# Altium PCB 故指测试架主板.PcbDoc
Units mil, origin at the board's own origin, x right, y up, seen from the top; angles counter-clockwise.
Board outline 3937.01 x 3937.01 mil, 2 copper layers (Top Layer, Bottom Layer); 125 components, 100 nets, 475 pads, 103 vias.
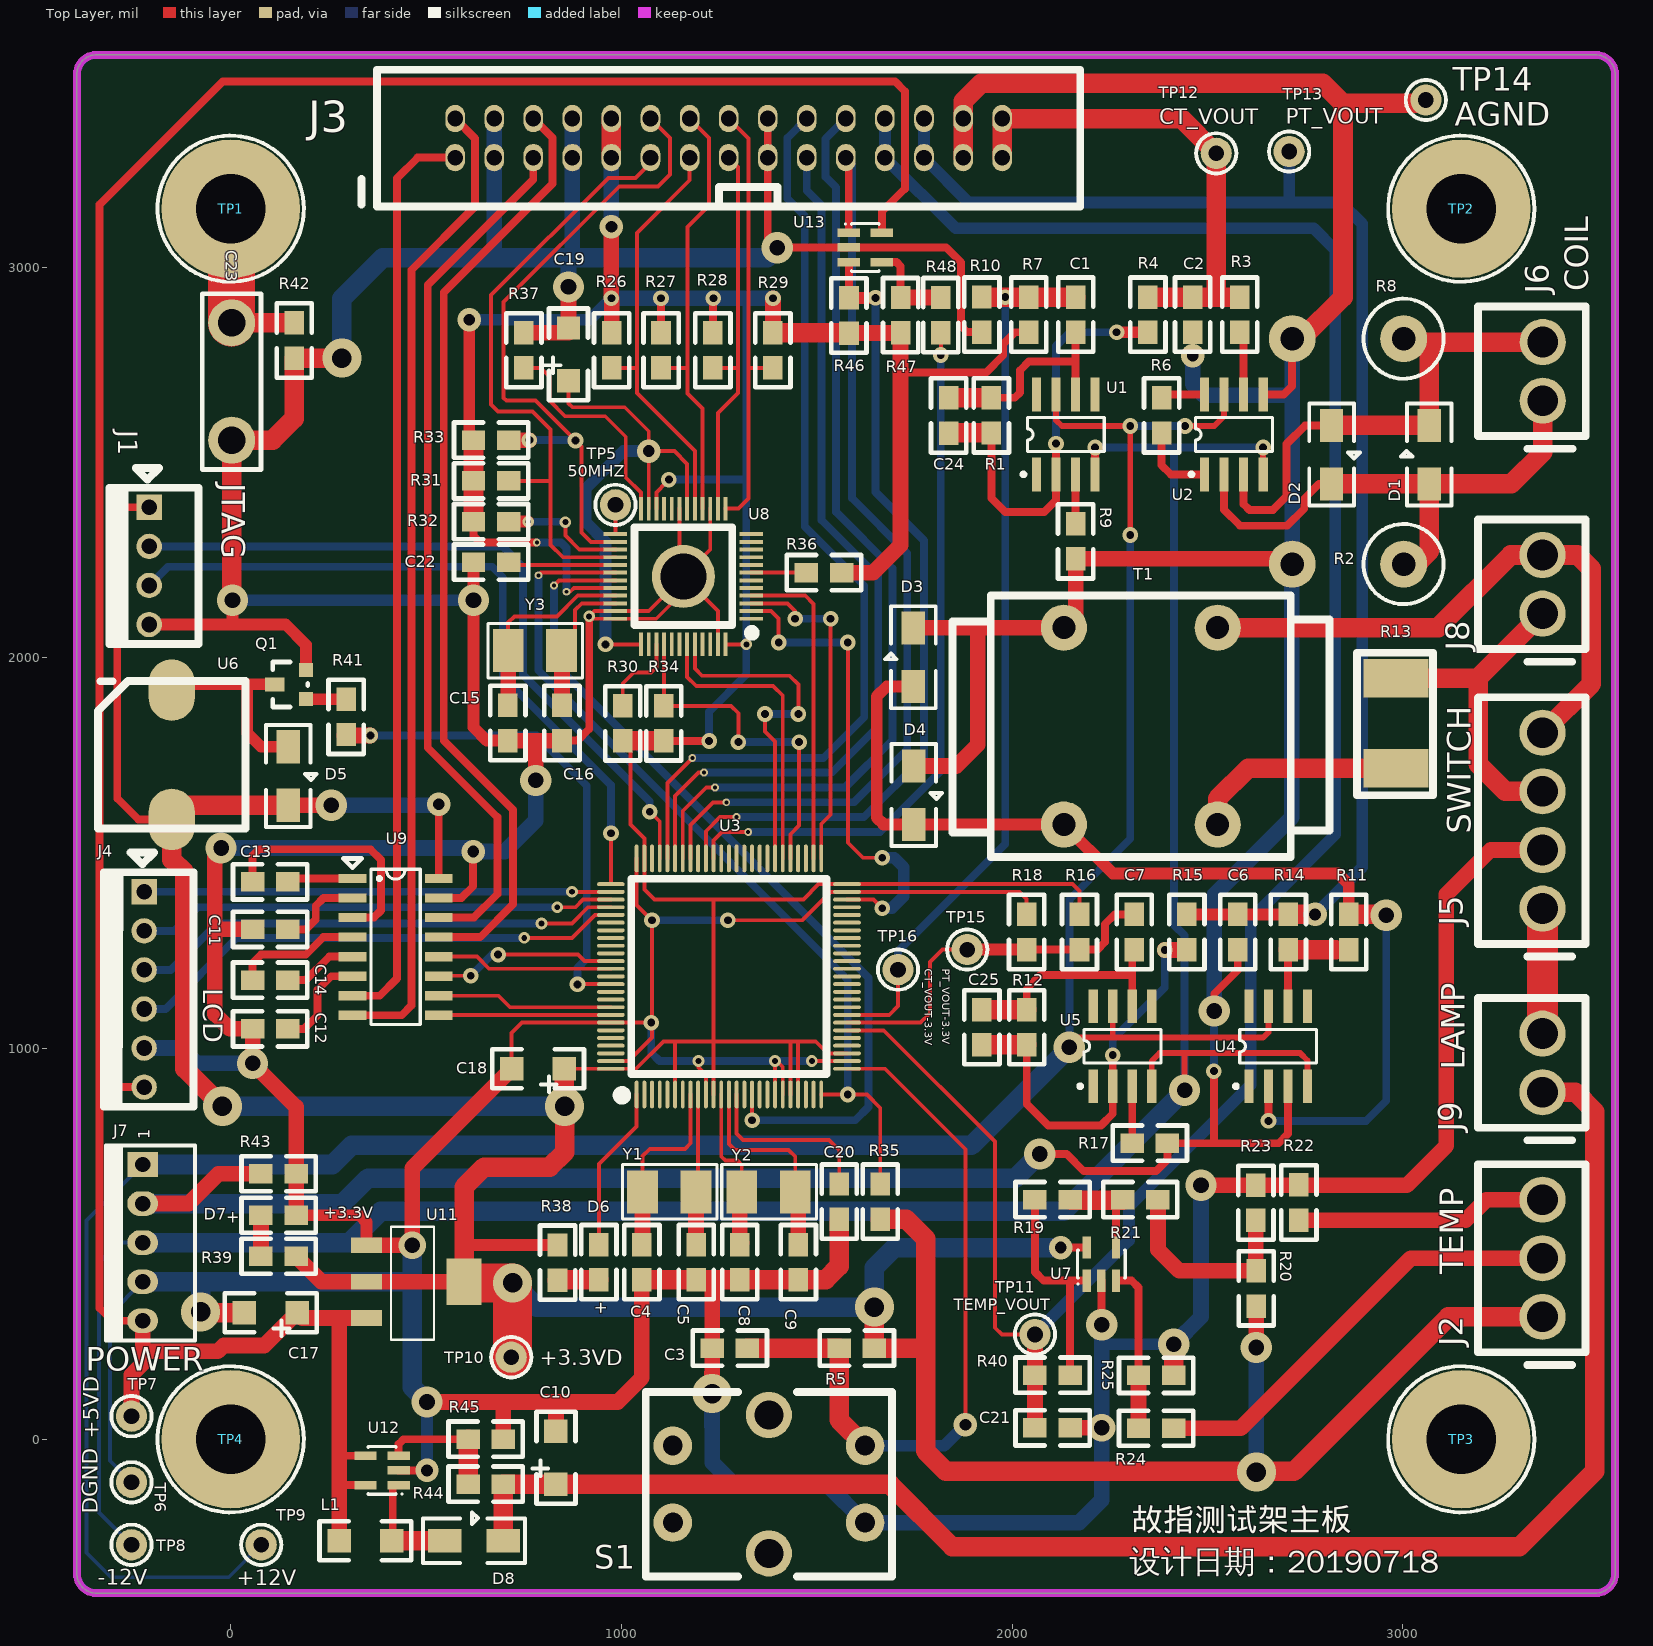
[diagram p0: Top Layer view]
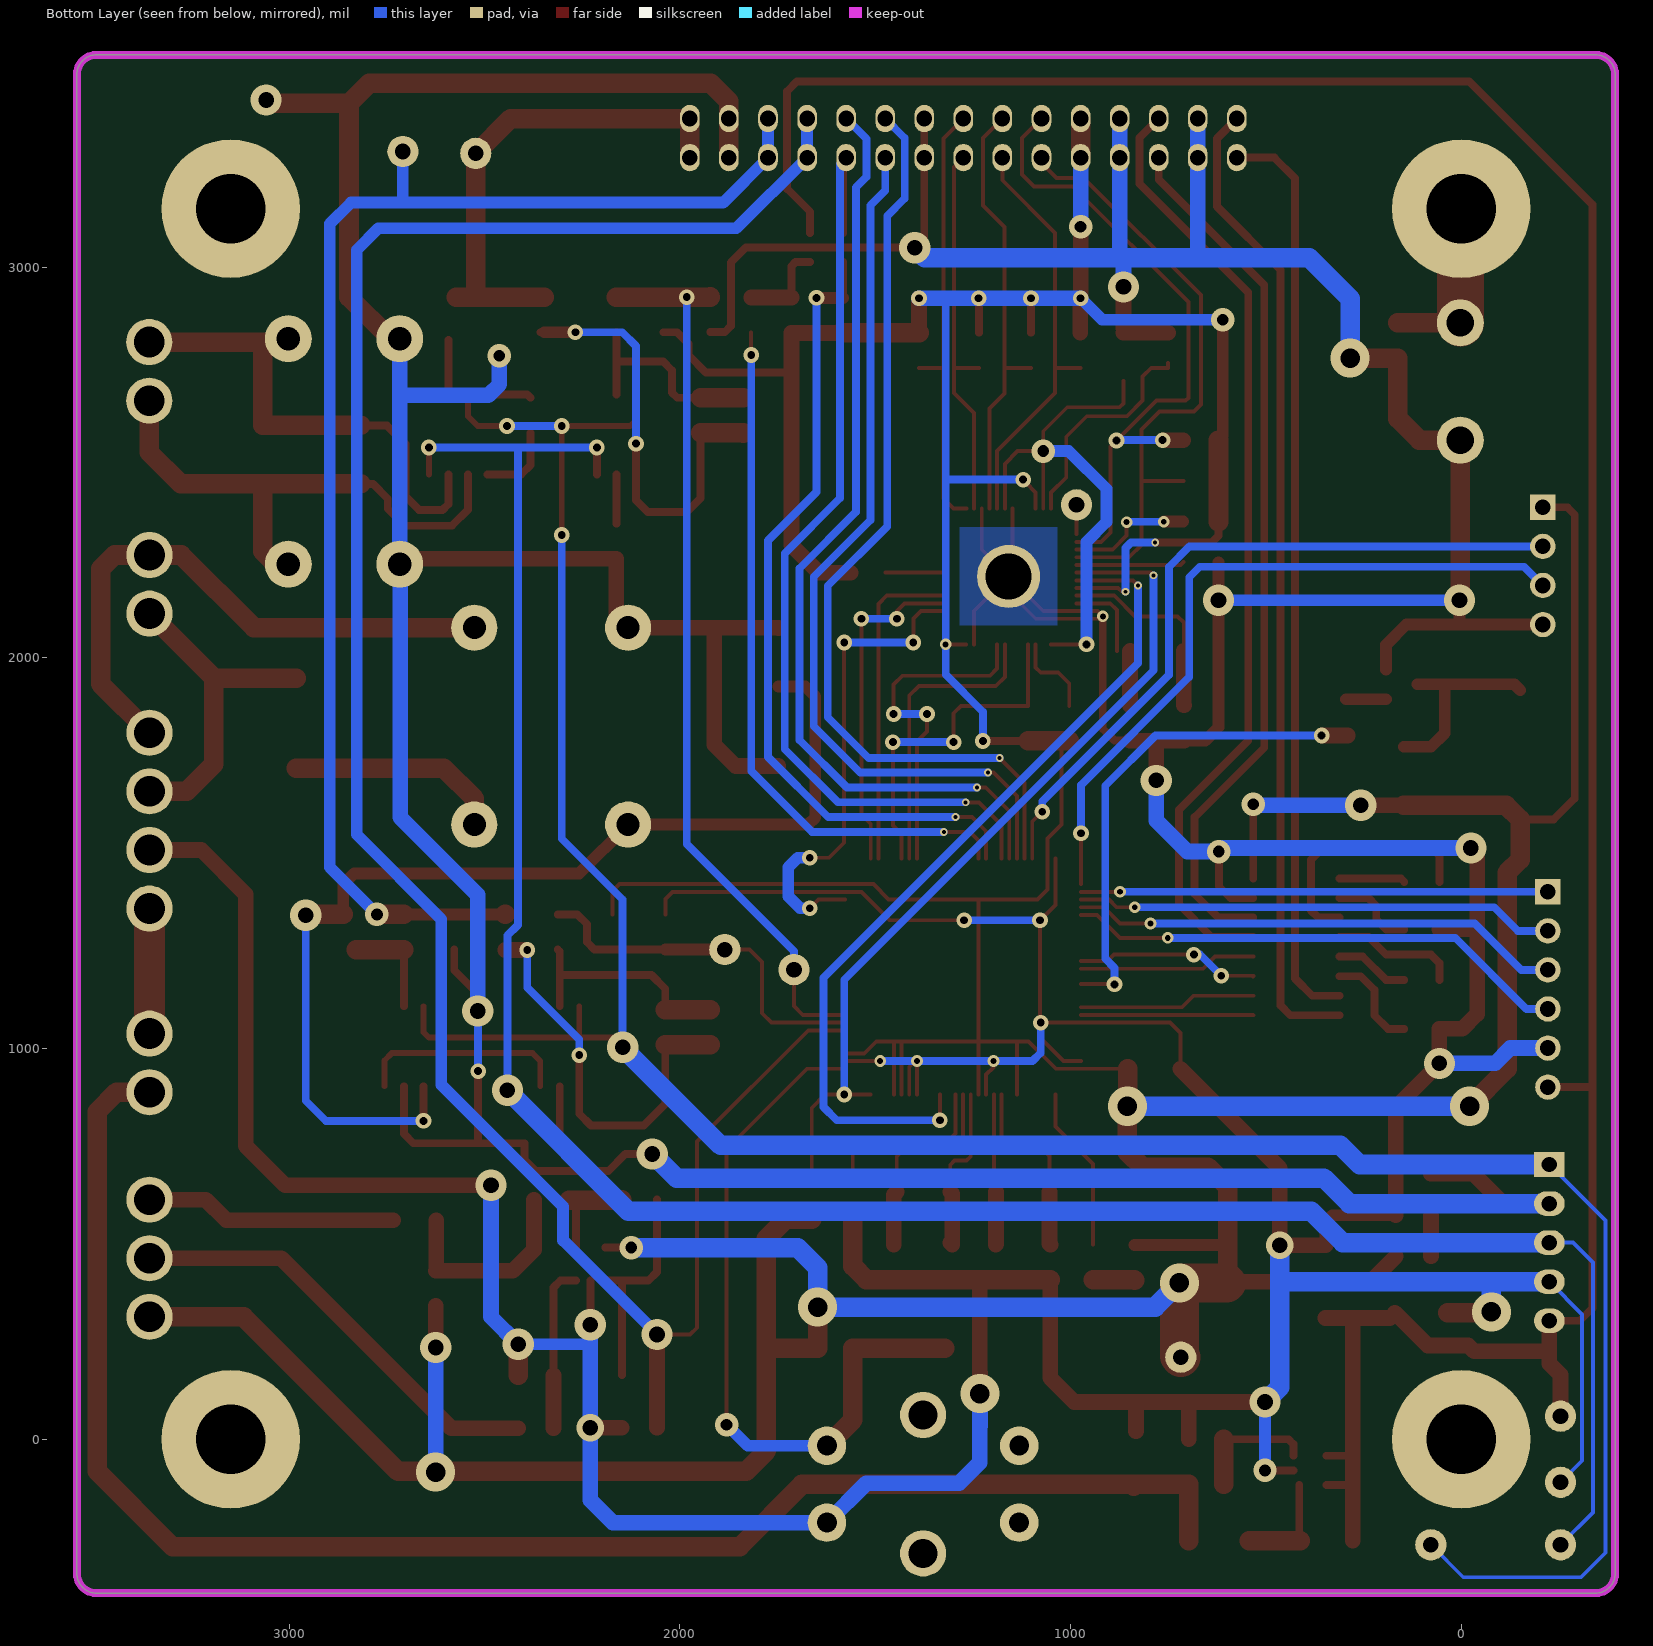
[diagram p1: Bottom Layer view, seen from below]

## Layer stack, top to bottom
Top Solder: solder mask 0.4, Solder Resist, Dk 3.5
Top Layer: signal copper 1.4
Dielectric 1: dielectric 12.6, FR-4, Dk 4.8
Bottom Layer: signal copper 1.4
Bottom Solder: solder mask 0.4, Solder Resist, Dk 3.5

## Board outline
-393.7,-343.7 ccw(c-343.7,-343.7) -343.7,-393.7 3493.31,-393.7 ccw(c3493.31,-343.7) 3543.31,-343.7 3543.31,3493.31 ccw(c3493.31,3493.31) 3493.31,3543.31 -343.7,3543.31 ccw(c-343.7,3493.31) -393.7,3493.31

## Design rules (kind name [scope] priority, off if disabled: settings)
Clearance [All] p1: gap=8 ignorepadtopadclearanceinfootprint=FALSE
ComponentClearance [All] p1 off: gap=10 collisioncheckmode=3 verticalgap=10 showdistances=FALSE
HoleSize [All] p1: absolutevalues=TRUE maxlimit=200 minlimit=1 maxpercent=80.000 minpercent=20.000
MinimumSolderMaskSliver [All] p1: minsoldermaskwidth=3
PolygonConnect [All] p1: connectstyle=Direct reliefconductorwidth=10 reliefentries=4 polygonreliefangle="90 Angle" airgapwidth=10
RoutingVias [All] p1: holewidth=20 width=40 viastyle="Through Hole" minholewidth=10 minwidth=20 maxholewidth=50 maxwidth=100
SilkToSilkClearance [All] p1 off: silktosilkclearance=10
SilkToSolderMaskClearance [IsPad] p1 off: minsilkscreentomaskgap=10 clearancetoexposedcopper=TRUE
SolderMaskExpansion [All] p1: expansion=4
Width [All] p1: maxlimit=200 minlimit=10 preferedwidth=10
25 further rules are at their usual default settings.

## Components (designator, comment, footprint, x,y, rotation, side; value= is the part's Value field where it differs from the comment)
C1 "0.1u" 0805 2162.45,2923.34 r270 top
C2 "0.1u" 0805 2462.45,2833.34 r90 top
C3 "0.1u" 0805 1322.45,233.78 r180 top
C4 "20p" 0805 1052.01,498.34 r270 top
C5 "20p" 0805 1191.01,498.34 r270 top
C6 "0.1u" 0805 2577.89,1253.34 r90 top
C7 "0.1u" 0805 2312.01,1343.34 r270 top
C8 "20p" 0805 1302.45,498.34 r270 top
C9 "20p" 0805 1452.45,498.34 r270 top
C10 "10u/16V" 1206C 832.45,-114.66 r90 top
C11 "0.1uF" 0805 146.08,1305.4 r180 top
C12 "0.1uF" 0805 146.08,1050.84 r180 top
C13 "0.1uF" 0805 146.08,1427.12 r180 top
C14 "0.1uF" 0805 56.08,1174.96 r0 top
C15 "20p" 0805 709.01,1878.34 r270 top
C16 "20p" 0805 847.45,1878.34 r270 top
C17 "10u/16V" 1206C 170,324 r180 top
C18 "10u/16V" 1206C 854.18,948.34 r180 top
C19 "10u/16V" 1206C 864.59,2709.34 r90 top
C20 "0.1u" 0805 1557.89,563.34 r90 top
C21 "0.1u" 0805 2148.45,29.78 r180 top
C22 "0.1u" 0805 621.45,2244.49 r0 top
C23 "472/250V" RAD0.3 2.24,2858.24 r270 top
C24 "0.1u" 0805 1837.01,2665.34 r270 top
C25 "0.1u" 0805 1922.01,1099.65 r270 top
D1 "SS14" SMA 3067.45,2445.25 r90 top
D2 "SS14" SMA 2817.45,2594.86 r270 top
D3 "SS14" SMA 1747.45,1926.73 r90 top
D4 "SS14" SMA 1748.45,1723.34 r270 top
D5 "SS14" SMA 147.45,1772.34 r270 top
D6 "DEBUG" LED-0805 942.45,408.34 r90 top
D7 "+3.3V" LED-0805 77.45,573.34 r0 top
D8 "SS14" SMA 547.84,-259.66 r0 top
J1 "JTAG" 2510-4Y -208.68,2385.34 r270 top
J2 "TEMP" KF2EDG3.81-3P 3357.45,313.34 r90 top
J3 "CON30" IDC-30 574.45,3280.34 r180 top
J4 "LCD" 2510-6Y -221.55,1401.34 r270 top
J5 "SWITCH" KF2EDG3.81-4P 3357.45,1358.34 r90 top
J6 "COIL" KF2EDG3.81-2P 3358.07,2658.34 r90 top
J7 "POWER" 2510-5Y -225.43,703.34 r90 top
J8 "TRANSFOMER" KF2EDG3.81-2P 3357.45,2113.34 r90 top
J9 "LAMP" KF2EDG3.81-2P 3357.45,888.34 r90 top
L1 "10uH/1A" 1206 277.45,-259.66 r0 top
Q1 "S9013" SOT-23 192.45,1894.34 r90 top
R1 "2k" 0805 1947.45,2575.61 r90 top
R2 "0.05" LVR03 3002,2240 r180 top
R3 "51" 0805 2582.01,2923.34 r270 top
R4 "10k" 0805 2347.01,2923.34 r270 top
R5 "10k" 0805 1647.45,233.78 r180 top
R6 "5.1k" 0805 2382.01,2665.61 r270 top
R7 "510" 0805 2042.89,2833.34 r90 top
R8 "0.05" LVR03 3002,2817 r180 top
R9 "10k" 0805 2162.89,2253.34 r90 top
R10 "510" 0805 1922.01,2923.66 r270 top
R11 "5.1k" 0805 2861.01,1343.34 r270 top
R12 "2k" 0805 2037.89,1009.65 r90 top
R13 "100k" 2512 2982.45,1948.34 r270 top
R14 "51" 0805 2707.45,1253.34 r90 top
R15 "10k" 0805 2447.01,1343.34 r270 top
R16 "510" 0805 2172.01,1343.34 r270 top
R17 "10k" 0805 2397.45,758.34 r180 top
R18 "510" 0805 2037.45,1253.34 r90 top
R19 "100k" 0805 2148.45,613.78 r180 top
R20 "100" 0805 2624.56,431 r270 top
R21 "1k" 0805 2283,612.9 r0 top
R22 "100" 0805 2733.56,651 r270 top
R23 "100" 0805 2623.45,650.34 r270 top
R24 "1k" 0805 2323.45,27.9 r0 top
R25 "100k" 0805 2323.45,162.9 r0 top
R26 "51" 0805 975.47,2742.34 r90 top
R27 "51" 0805 1101.78,2742.34 r90 top
R28 "51" 0805 1234.78,2742.34 r90 top
R29 "51" 0805 1388.34,2742.34 r90 top
R30 "10k" 0805 1003.89,1787.34 r90 top
R31 "10k" 0805 711.45,2453.34 r180 top
R32 "10k" 0805 711.45,2349.34 r180 top
R33 "10k" 0805 711.45,2557.78 r180 top
R34 "10k" 0805 1108.89,1787.34 r90 top
R35 "10k" 0805 1662.01,653.34 r270 top
R36 "10k" 0805 1563.45,2218.78 r180 top
R37 "4.87k" 0805 749.9,2832.34 r270 top
R38 "1k" 0805 836.89,407.34 r90 top
R39 "1k" 0805 77.45,467.9 r0 top
R40 "510" 0805 2058.45,163.9 r0 top
R41 "510" 0805 295.01,1893.9 r270 top
R42 "1M" 0805 162.01,2857.34 r270 top
R43 "0" 0805 77.45,679.34 r0 top
R44 "10k" 0805 697.45,-114.22 r180 top
R45 "1.2k" 0805 607.45,-0.1 r0 top
R46 "10k" 0805 1582.01,2921.34 r270 top
R47 "10k" 0805 1714.89,2832.34 r90 top
R48 "0" 0805 1817.89,2832.34 r90 top
S1 "" B3F-4055 1623.48,-213.32 r0 top
T1 "TR3121CH 2mA/2mA" TR3121CH 2132.45,1573.34 r90 top
TP1 "" PAD4.5 0,3149.61 r0 top locked
TP2 "" PAD4.5 3149.61,3149.61 r0 top locked
TP3 "" PAD4.5 3149.61,0 r0 top locked
TP4 "" PAD4.5 0,0 r0 top locked
TP5 "50MHZ" TESTPOINT 984.73,2391.73 r0 top
TP6 "DGND" TESTPOINT -254,-110 r0 top
TP7 "+5VD" TESTPOINT -254,59 r0 top
TP8 "-12V" TESTPOINT -254,-270 r0 top
TP9 "+12V" TESTPOINT 78,-270 r0 top
TP10 "+3.3VD" TESTPOINT 718,210 r90 top
TP11 "TEMP_VOUT" TESTPOINT 2058.45,268.34 r90 top
TP12 "CT_VOUT" TESTPOINT 2522.45,3291.34 r90 top
TP13 "PT_VOUT" TESTPOINT 2709,3296 r90 top
TP14 "AGND" TESTPOINT 3059,3428 r90 top
TP15 "PT_VOUT-3.3V" TESTPOINT 1885,1253.34 r90 top
TP16 "CT_VOUT-3.3V" TESTPOINT 1708,1202 r90 top
U1 "OP07" SO-8 2062.45,2469.58 r90 top
U2 "AD620ARZ" SO-8 2492.45,2469.58 r90 top
U3 "STM32F107VCT6" LQFP100_L 1038.97,882.39 r90 top
U4 "OP07" SO-8 2606.08,903.62 r90 top
U5 "OP07" SO-8 2207.45,903.62 r90 top
U6 "HN9650B" HN9650B -150.94,1586.63 r180 top
U7 "opa340" SOT23-5 2228.45,448.34 r0 top
U8 "DP83848CVV" DP83848 1332.17,2100.07 r180 top
U9 "MAX3232" SO-16 312.45,1435.4 r0 top
U11 "AS1117-3.3" SOT-223 472.45,403.34 r180 top
U12 "MIC2288" SOT23-5 387.45,-79.66 r90 top
U13 "STMPS2141STR" SOT23-5 1624.32,3050.4 r270 top
Y1 "32.768" XTAL-5032 1122.45,633.34 r180 top
Y2 "8M" XTAL-5032 1376.45,633.34 r180 top
Y3 "25M" XTAL-5032 778.45,2018.34 r180 top

## Footprints (in the part's own frame and the unit in brackets; to place one, negate y for a bottom-side part, rotate by r counter-clockwise, add the part's x,y. Pads: shape width x height; smd on the part's side, far side on the other; paste and mask are expansions set on the pad)
0805 [mil]
  rect 60x50 smd: 1(0,0.44) 2(90,0.44)
  silkscreen extent -50,-45 140,45
1206 [mil]
  rect 60x60 smd: 1(0,0) 2(135,0)
  silkscreen extent -50,-50 185,50
1206C [mil]
  rect 60x60 smd: 1(0,0) 2(135,0)
  silkscreen extent -50,-50 185,60
2510-4Y [mil]
  rect 65x65 hole 40: 1(0,0)
  round 65 hole 40: 2(100,0) 3(200,0) 4(300,0)
  silkscreen extent -100,-102 350,126
2510-5Y [mm]
  rect 1.6x2 hole 1: 1(0,0)
  oval 1.6x2 hole 1: 2(-2.54,0) 3(-5.08,0) 4(-7.62,0) 5(-10.16,0)
  silkscreen extent -11.46,-3.4 1.24,2.4
2510-6Y [mil]
  rect 65x65 hole 40: 1(0,0)
  round 65 hole 40: 2(100,0) 3(200,0) 4(300,0) 5(400,0) 6(500,0)
  silkscreen extent -100,-102 550,126
2512 [mm]
  rect 2.5x4.2 smd: 1(0,0) 2(5.85,0)
  silkscreen extent -1.65,-2.54 7.62,2.41
B3F-4055 [mm]
  round 3 hole 1.9: 0(-6.249,6.999) 0(-6.249,-2.001)
  round 2.5 hole 1.3: 1(0.001,-0.001) 2(-12.499,-0.001) 3(0.001,4.999) 4(-12.499,4.999)
  silkscreen extent -14.25,-3.5 1.75,8.5
DP83848 [mil]
  rect 60x10 smd mask+3: 1(0,0) 2(0,-19.68) 3(0,-39.37) 4(0,-59.06) 5(0,-78.74) 6(0,-98.43) 7(0,-118.11) 8(0,-137.8) 9(0,-157.48) 10(0,-177.17) 11(0,-196.85) 12(0,-216.54) 25(347.44,-216.54) 26(347.44,-196.85) 27(347.44,-177.17) 28(347.44,-157.48) 29(347.44,-137.8) 30(347.44,-118.11) 31(347.44,-98.43) 32(347.44,-78.74) 33(347.44,-59.06) 34(347.44,-39.37) 35(347.44,-19.68) 36(347.44,0)
  rect 10x60 smd mask+3: 13(65.45,-281.99) 14(85.14,-281.99) 15(104.82,-281.99) 16(124.51,-281.99) 17(144.19,-281.99) 18(163.88,-281.99) 19(183.56,-281.99) 20(203.25,-281.99) 21(222.93,-281.99) 22(242.62,-281.99) 23(262.3,-281.99) 24(281.99,-281.99) 37(281.99,65.45) 38(262.3,65.45) 39(242.62,65.45) 40(222.93,65.45) 41(203.25,65.45) 42(183.56,65.45) 43(163.88,65.45) 44(144.19,65.45) 45(124.51,65.45) 46(104.82,65.45) 47(85.14,65.45) 48(65.45,65.45)
  round 161.42 hole 118.11 mask+3: 49(173.72,-108.27)
  silkscreen extent -12,-234 298,46
HN9650B [mm]
  oval 3x4 smd: 1(0,0) 2(0,-8.4)
  silkscreen extent -4.8,-9 4.8,0.6
IDC-30 [mil]
  oval 50x70 hole 40: 1(0,0) 2(0,-100) 3(-100,0) 4(-100,-100) 5(-200,0) 6(-200,-100) 7(-300,0) 8(-300,-100) 9(-400,0) 10(-400,-100) 11(-500,0) 12(-500,-100) 13(-600,0) 14(-600,-100) 15(-700,0) 16(-700,-100) 17(-800,0) 18(-800,-100) 19(-900,0) 20(-900,-100) 21(-1000,0) 22(-1000,-100) 23(-1100,0) 24(-1100,-100) 25(-1200,0) 26(-1200,-100) 27(-1300,0) 28(-1300,-100) 29(-1400,0) 30(-1400,-100)
  silkscreen extent -1600,-225 240,125
KF2EDG3.81-2P [mm]
  round 3 hole 2: 1(0,0) 2(3.81,0)
  silkscreen extent -3.13,-2.8 6.11,4.2
KF2EDG3.81-3P [mm]
  round 3 hole 2: 1(0,0) 2(3.81,0) 3(7.62,0)
  silkscreen extent -3.13,-2.8 9.92,4.2
KF2EDG3.81-4P [mm]
  round 3 hole 2: 1(0,0) 2(3.81,0) 3(7.62,0) 4(11.43,0)
  silkscreen extent -3.13,-2.8 13.73,4.2
LED-0805 [mil]
  rect 60x50 smd: 1(0,0) 2(90,0)
  silkscreen extent -50,-45 140,45
LQFP100_L [mm] "Thin QFP, 100-Leads, Body 14x14mm, Pitch 0.5mm, IPC High Density"
  oval 1.8x0.254 smd mask+0.076: 1(0,0) 2(0,-0.5) 3(0,-1) 4(0,-1.5) 5(0,-2) 6(0,-2.5) 7(0,-3) 8(0,-3.5) 9(0,-4) 10(0,-4.5) 11(0,-5) 12(0,-5.5) 13(0,-6) 14(0,-6.5) 15(0,-7) 16(0,-7.5) 17(0,-8) 18(0,-8.5) 19(0,-9) 20(0,-9.5) 21(0,-10) 22(0,-10.5) 23(0,-11) 24(0,-11.5) 25(0,-12) 51(15.35,-12) 52(15.35,-11.5) 53(15.35,-11) 54(15.35,-10.5) 55(15.35,-10) 56(15.35,-9.5) 57(15.35,-9) 58(15.35,-8.5) 59(15.35,-8) 60(15.35,-7.5) 61(15.35,-7) 62(15.35,-6.5) 63(15.35,-6) 64(15.35,-5.5) 65(15.35,-5) 66(15.35,-4.5) 67(15.35,-4) 68(15.35,-3.5) 69(15.35,-3) 70(15.35,-2.5) 71(15.35,-2) 72(15.35,-1.5) 73(15.35,-1) 74(15.35,-0.5) 75(15.35,0)
  oval 0.254x1.8 smd mask+0.076: 26(1.675,-13.675) 27(2.175,-13.675) 28(2.675,-13.675) 29(3.175,-13.675) 30(3.675,-13.675) 31(4.175,-13.675) 32(4.675,-13.675) 33(5.175,-13.675) 34(5.675,-13.675) 35(6.175,-13.675) 36(6.675,-13.675) 37(7.175,-13.675) 38(7.675,-13.675) 39(8.175,-13.675) 40(8.675,-13.675) 41(9.175,-13.675) 42(9.675,-13.675) 43(10.175,-13.675) 44(10.675,-13.675) 45(11.175,-13.675) 46(11.675,-13.675) 47(12.175,-13.675) 48(12.675,-13.675) 49(13.175,-13.675) 50(13.675,-13.675) 76(13.675,1.675) 77(13.175,1.675) 78(12.675,1.675) 79(12.175,1.675) 80(11.675,1.675) 81(11.175,1.675) 82(10.675,1.675) 83(10.175,1.675) 84(9.675,1.675) 85(9.175,1.675) 86(8.675,1.675) 87(8.175,1.675) 88(7.675,1.675) 89(7.175,1.675) 90(6.675,1.675) 91(6.175,1.675) 92(5.675,1.675) 93(5.175,1.675) 94(4.675,1.675) 95(4.175,1.675) 96(3.675,1.675) 97(3.175,1.675) 98(2.675,1.675) 99(2.175,1.675) 100(1.675,1.675)
  silkscreen extent -0.35,-12.35 14.02,1.26
LVR03 [mil]
  round 120 hole 60: 1(0,0) 2(285,0)
  silkscreen extent -103,-103 102,103
PAD4.5 [mm]
  round 9 hole 4.5: 0(0,0)
  silkscreen extent -4.75,-4.75 4.75,4.75
RAD0.3 [mil]
  round 120 hole 70: 1(0.9,0.2) 2(300.9,0.2)
  silkscreen extent -74,-75 376,75
SMA [mil]
  rect 85x60 smd: 1(0,0) 2(149.61,0)
  silkscreen extent -56,-57 205,73
SO-8 [mm]
  rect 2.2x0.6 smd: 1(0,0) 2(0,-1.27) 3(0,-2.54) 4(0,-3.81) 5(5.2,-3.81) 6(5.2,-2.54) 7(5.2,-1.27) 8(5.2,0)
  silkscreen extent -0.12,-4.41 3.7,0.97
SO-16 [mm]
  rect 1.8x0.6 smd: 1(-0.016,-0.003) 2(-0.016,-1.273) 3(-0.016,-2.543) 4(-0.016,-3.813) 5(-0.016,-5.083) 6(-0.016,-6.353) 7(-0.016,-7.623) 8(-0.016,-8.893) 9(5.584,-8.893) 10(5.584,-7.623) 11(5.584,-6.353) 12(5.584,-5.083) 13(5.584,-3.813) 14(5.584,-2.543) 15(5.584,-1.273) 16(5.584,-0.003)
  silkscreen extent -0.62,-9.5 4.38,1.3
SOT23-5 [mm] "SOT-23/SC-74A; 5 Leads; Body 3 x 3 mm, inc. leads (LxW max)"
  rect 0.55x1.45 smd: 1(-0.95,-1.075) 2(0,-1.075) 3(0.95,-1.075) 4(0.95,1.075) 5(-0.95,1.075)
  silkscreen extent -1.57,-1.35 1.55,0.9
SOT-23 [mil]
  rect 36x36 smd: 1(0,0) 2(75,0)
  rect 36x50 smd: 3(38,80)
  silkscreen extent -20,-5 95,85
SOT-223 [mil]
  rect 80x40 smd: 1(125,-93) 2(125,0) 3(125,93)
  rect 90x120 smd: 2(-125,0)
  silkscreen extent -48,-141 62,149
TESTPOINT [mil] "TESTPOINT"
  round 80 hole 40: 0(0,0)
  silkscreen extent -51,-51 51,51
TR3121CH [mm]
  round 3 hole 1.5: 1(0,0) 2(12.8,0) 3(12.8,-10) 4(0,-10)
  silkscreen extent -2.1,-17.28 14.9,7.23
XTAL-5032 [mm]
  rect 2x2.8 smd: 1(-1.737,0) 2(1.737,0)
  silkscreen extent -3.11,-1.78 3.04,1.78

## Part data
C1 C2 C3 C4 C5 C6 C7 C8 C9 C11 C12 C13 C14 C15 C16 C20 C21 C22 C23 C24 C25: library part CAP, "Capacitor"
C10 C17 C18 C19: library part "CAPACITOR POL", "Capacitor"
D1 D2 D3 D4 D5 D8: "Diode"
D6 D7: library part LED-0805
J1 J5: library part CON4, "Connector", =D6105200402
J2: library part CON3, "Connector", =D6105200402
J4: library part CON6
J6 J8 J9: library part CON2, "Connector", =D6105200402
J7: library part CON5
L1: library part INDUCTOR_1, Part Field 1=D3132005710501
R1 R4 R5 R9 R11 R12 R13 R14 R15 R17 R20 R22 R23 R26 R27 R28 R29 R30 R31 R32 R33 R34 R35 R36 R37 R38 R39 R41 R42 R43 R46 R47 R48: library part R
R2 R3 R6 R7 R8 R10 R16 R18 R19 R21 R24 R25 R40 R44 R45: library part 电阻
S1: library part B3F-4055
TP1 TP2 TP3 TP4 TP5 TP6 TP7 TP8 TP9 TP10 TP11 TP12 TP13 TP14 TP15 TP16: library part TESTPT
U1 U4 U5: library part OP07CS, "Ultra-Low Offset Voltage Operational Amplifier"
U2: library part AD620AN, "Low-Cost, Low-Power Instrumentation Amplifier"
Y1 Y2 Y3: library part XTAL, "Crystal Oscillator", LatestRevisionDate=17-Jul-2002, LatestRevisionNote="Re-released for DXP Platform.", PackageReference=R38, Published=8-Jun-2000, Publisher="Altium Limited"

## Via types
v1: diameter 40, hole 20, Top Layer to Bottom Layer, 44 vias
v2: diameter 80, hole 40, Top Layer to Bottom Layer, 18 vias
v3: diameter 30, hole 15, Top Layer to Bottom Layer, 11 vias
v4: diameter 60, hole 30, Top Layer to Bottom Layer, 10 vias
v5: diameter 20, hole 10, Top Layer to Bottom Layer, 10 vias
v6: diameter 100, hole 50, Top Layer to Bottom Layer, 8 vias
v7: diameter 70, hole 40, Top Layer to Bottom Layer, 2 vias

## Nets (pads, with @x,y where several pads share a name; then routed paths per layer and width w, separated by ;. In a path a pad name is that pad's centre, name@x,y a point inside that pad or via, vN(x,y) a via of type N, cw(c..) or ccw(c..) an arc to the next point about the centre after c; other vN are vias at no path point)
+3.3VD: C18.1 D5.2 J1.1 J2.1 J3.9 J3.10 R5.1 R7.1 R16.1 R20.2 R26.2 R27.2 R28.2 R29.2 R30.1 R31.2 R32.2 R33.2 R34.1 R35.2 R36.1 R38.2 R39.2 R46.2 R47.1 TP10.0 U3.6 U3.11 U3.21 U3.22 U3.28 U3.50 U3.74 U3.100 U6.1 U7.5 U8.22 U8.32 U8.48 U9.16 U11.2 | length 19117.4
  Top Layer w10: C18.1 U3.100 1037.45,948.34 1107.45,1018.34 1137.45,1018.34 ; v5(859.45,2169.34) 868.97,2169.34 878.45,2178.81 U8.32 ; R30.1@1023.45,1786.34 1023.45,1573.34 1058.65,1538.13 U3.74 1058.65,1407.13 1084.38,1381.41 1237.45,1381.41 ; U8.22 1089.55,2423.44 v1@1114.45,2448.34 ; U3.6 1137.39,1018.28 1137.45,1018.34 ; U3.11 1235.82,1018.34 ; U8.48@1267.03,2034.62 v3(1319.73,2034.62) ; U3.21 1432.67,1018.12 1432.45,1018.34 ; U3.22 1452.35,1018.24 1452.45,1018.34 ; U3.28 1528.08,987.71 1497.45,1018.34 1452.45,1018.34 ; R16.1 2172.45,1403.34 2155.01,1420.78 U3.50 1504.89,1420.78 1465.52,1381.41 1237.45,1381.41 ; 1137.45,1018.34 1235.82,1018.34 ; 1235.82,1018.34 1235.82,1379.78 1237.45,1381.41 ; 1235.82,1018.34 1432.45,1018.34 ; 1432.45,1018.34 1452.45,1018.34
  Top Layer w20: J1.1 -271.55,2385.34 -290.55,2366.34 -290.55,1640.34 -236.84,1586.63 U6.1 ; U9.16 v4@532.28,1631.18 ; R32.2 621.45,2312.34 638.45,2295.34 v5(783.45,2295.34) ; v1(974.34,2920.34) v1@975.03,2919.65 ; R27.2 v1(1101.34,2920.34) ; R34.1 v1(1224.45,1787.34) ; R28.2 1234.34,2919.34 v1(1235.34,2920.34) ; R46.2@1587.89,2832.34 R46.2@1588.89,2831.34 ; 1714.45,2729.34 1715.45,2730.34 1933.45,2730.34 1977.45,2774.34 1977.45,2803.34 2007.45,2833.34 R7.1 ; v4(2124.77,490.66) U7.5
  Top Layer w30: 597.45,500.34 600.45,497.34 R38.2 ; v4(610.45,2865.34) 610.45,2568.34 R33.2
  Top Layer w40: D5.2 v2(257.05,1622.73) ; R39.2 232.45,403.34 347.45,403.34 U11.2@597.45,403.34 ; v1(974.34,2920.34) v4(974.34,3103.24) ; R26.2 v1@975.03,2919.65 ; R29.2 v1(1387.9,2920.34) ; R36.1 1644.45,2218.34 1714.45,2288.34 1714.45,2729.34 R47.1 1713.45,2831.34 R46.2@1588.89,2831.34 ; v2(2625,235) R20.2
  Top Layer w50: v6(-21.55,852.34) -117.55,948.34 -117.55,1450.34 -150.94,1483.72 U6.1 -114.84,1622.73 D5.2 ; U11.2@600.45,400.34 597.45,403.34 597.45,500.34 597.45,645.34 648.45,696.34 816.45,696.34 854.45,734.34 v6(854.45,852.34) ; R32.2 R33.2 ; v6@854.18,852.34 C18.1 ; J3.9 J3.10 ; R30.1 R34.1 ; R29.2 R46.2@1587.89,2832.34 ; v6(1647.45,338.34) R5.1 1778.45,233.34 ; R35.2 1728.45,563.34 1778.45,513.34 1778.45,233.34 ; J2.1 3116.34,313.34 2721.02,-81.98 1830.76,-81.98 1778.45,-29.66 1778.45,233.34
  Top Layer w100: U11.2@600.45,400.34 v6(721.45,400.34) 721.45,213.45 TP10.0
  Bottom Layer w20: v5(783.45,2295.34) 845.45,2295.34 859.45,2281.34 v5(859.45,2169.34) ; v1(1121.45,2456.34) 1319.07,2456.34 1319.73,2457 ; v1(1224.45,1787.34) 1224.45,1862.34 1319.73,1957.62 v3(1319.73,2034.62) 1319.73,2457 ; 1319.73,2916.62 1319.73,2457
  Bottom Layer w30: v4(610.45,2865.34) 919.34,2865.34 v1(974.34,2920.34)
  Bottom Layer w40: v2(257.05,1622.73) 529.84,1622.73 v4(532.45,1625.34) ; v1(974.34,2920.34) v1(1101.34,2920.34) v1(1235.34,2920.34) v1(1387.9,2920.34) ; v4(974.34,3103.24) 974.34,3280.24 J3.9 ; v6(2625,-84) v2(2625,235)
  Bottom Layer w50: v6(-21.55,852.34) v6(854.45,852.34) ; v6(721.45,400.34) 783.45,338.34 v6(1647.45,338.34) 1647.45,439.34 1698.77,490.66 v4(2124.77,490.66)
+5VD: C17.1 J4.6 J7.5 L1.1 TP7.0 U11.3 U12.4 U12.5 U13.5 | length 7198.5
  Top Layer w20: J7.5 -303.55,303.34 -335.55,335.34 -335.55,902.34 ; J4.6 -334.55,901.34 -335.55,902.34 ; 280.05,-117.06 U12.5 ; 280.05,-42.26 U12.4 ; U13.5 1666.65,3141.54 1725.45,3200.34 1725.45,3450.34 1700.45,3475.34 -20.55,3475.34 -335.55,3160.34 -335.55,902.34
  Top Layer w40: TP7.0@-241.43,71.57 TP7.0 -254,165 -225.43,193.57 J7.5 ; -202.43,225 -33,225 -18,240 86,240 C17.1 ; C17.1@183.01,310.34 U11.3 ; L1.1 277.45,305.34
+12V: J7.1 TP9.0 U1.7 U2.7 U4.7 U5.7 | length 6952.1
  Top Layer w15: U1.7 2112.45,2608.34 2127.45,2593.34 v1(2302.45,2593.34) v1(2302.45,2314.34) ; v2(2146.45,1003.34) 2171.45,1028.34 2259.45,1028.34 ; U5.7 2257.45,1030.34 2259.45,1028.34 ; v1(2442.45,2593.34) 2517.45,2593.34 2542.45,2618.34 U2.7 ; U4.7 2656.08,1041.98 2642.45,1028.34 2259.45,1028.34
  Bottom Layer w10: J7.1 -368.7,560.07 -368.7,-290.3 -306,-353 -5,-353 TP9.0
  Bottom Layer w20: v2(2146.45,1003.34) 2146.45,1381.34 2302.45,1537.34 v1(2302.45,2314.34) ; v1(2302.45,2593.34) v1(2442.45,2593.34)
  Bottom Layer w50: J7.1 260.45,703.34 309.45,752.34 1895.45,752.34 v2(2146.45,1003.34)
+12VD: C10.1 D8.2 J9.1 R44.1 | length 4162.3
  Top Layer w50: D8.2 R44.1 C10.1 C10.1@838.45,-120.66 ; C10.1@838.45,-115.66 1687.45,-115.66 1846.79,-275 3298.11,-275 3491.45,-81.66 3491.45,838.34 3441.45,888.34 J9.1
-12V: J7.3 TP8.0 U1.4 U2.4 U4.4 U5.4 | length 6591.8
  Top Layer w15: U5.4 2357.45,968.34 2377.45,988.34 2441.45,988.34 ; v2(2441.45,893.34) 2441.45,988.34 ; U2.4 v1@2642.45,2548.34 ; U4.4 2756.08,969.7 2737.45,988.34 2441.45,988.34
  Top Layer w20: U1.4 v1(2212.45,2538.34)
  Bottom Layer w10: TP8.0 -337,-187 -337,452 -285.66,503.34 J7.3
  Bottom Layer w20: v1(2212.45,2538.34) 2414.45,2538.34 ; v2(2441.45,893.34) 2441.45,1289.34 2414.45,1316.34 2414.45,2538.34 ; v1(2642.45,2538.34) 2414.45,2538.34
  Bottom Layer w50: J7.3 303.45,503.34 383.45,583.34 2131.45,583.34 v2(2441.45,893.34)
AC-HV+: J5.3 J8.1 R13.1 | length 857.3
  Top Layer w50: R13.1 3192.45,1948.34 ; J5.3 3262.45,1658.34 3192.45,1728.34 3192.45,1948.34 ; J8.1 3192.45,1948.34
AC-HV-: J5.4 J8.2 T1.3 | length 1519.2
  Top Layer w50: T1.3 3090.28,2077.28 3276.34,2263.34 J8.2 3446.66,2263.34 3482.45,2227.55 3482.45,1933.34 J5.4
AGND: C2.1 C6.1 D3.2 D4.1 J3.27 J3.28 J7.2 R2.2 R8.2 R9.1 R17.1 R43.1 T1.2 TP14.0 U2.5 U4.3 | length 10072.9
  Top Layer w20: v2(2070.45,730.34) 2139.45,730.34 2183.45,686.34 2368.45,686.34 2397.45,715.34 R17.1 2516.45,757.9 ; v1(2516.45,942.34) 2516.45,757.9 ; v2(2517.45,1096.34) 2517.45,1140.34 2577.45,1200.34 C6.1 ; U2.5 2695.3,2674.3 2716.12,2695.12 R8.2@2716.12,2783.66 ; U4.3 2706.08,781.98 2682.01,757.9 2516.45,757.9
  Top Layer w40: J7.2 -107.55,603.34 -31.11,679.78 R43.1 ; D3.2 1748.38,2077.28 1912.45,2077.28 ; D4.1 1857.45,1723.34 1912.45,1778.34 1912.45,2077.28 ; R2.2 2703.66,2253.34 R9.1 2162.45,2107.28 T1.2 1912.45,2077.28
  Top Layer w50: J3.27 J3.28 1874.45,3424.34 1920.45,3470.34 2795.45,3470.34 2846.82,3418.97 ; R8.2 2740.82,2817 2846.82,2923 2846.82,3418.97 ; TP14.0 3049.97,3418.97 2846.82,3418.97
  Bottom Layer w20: v1(2516.45,942.34) 2516.45,1095.34 v2(2517.45,1096.34)
  Bottom Layer w40: v4(2462.01,2773.34) 2462.01,2699.99 2490,2672 2717,2672 ; v2(2517.45,1096.34) 2517.45,1393.34 2716.12,1592.02 2716.12,2239.12 R2.2 2717,2672 ; R8.2@2717,2761 R8.2 ; R8.2@2717,2814 2717,2672
  Bottom Layer w50: J7.2 286.45,603.34 351.45,668.34 2008.45,668.34 v2(2070.45,730.34)
BEEP: R41.2 U3.89 | length 1277.7
  Top Layer w10: v1(887.45,1164.34) 887.98,1164.87 U3.89
  Top Layer w40: R41.2@290.89,1801.34 v1(357.45,1801.34)
  Bottom Layer w20: v1(357.45,1801.34) 782.45,1801.34 911.45,1672.34 911.45,1230.34 887.45,1206.34 v1(887.45,1164.34)
CT+: D1.2 D2.1 J6.2 R8.1 U2.3 | length 1296.8
  Top Layer w20: U2.3 2592.45,2393.34 2607.45,2378.34 2667.45,2378.34 2702.45,2413.34 2702.45,2547.34 2749.97,2594.86 D2.1
  Top Layer w50: D2.1 D1.2 3067.45,2803.55 3063,2808 ; R8.1@3002,2808 3357.73,2808 J6.2
CT-: D1.1 D2.2 J6.1 R2.1 U2.2 | length 1395.7
  Top Layer w20: U2.2 2542.45,2379.34 2583.45,2338.34 2703.73,2338.34 2747.45,2382.06 2747.45,2407.34 2785.36,2445.25 D2.2
  Top Layer w50: D2.2 D1.1 ; R2.1@3002,2249 3044.11,2249 3067.45,2272.34 D1.1 ; J6.1 3358.07,2526.07 3277.25,2445.25 D1.1
CT_VOUT: C2.2 J3.29 J3.30 R3.1 R4.1 TP12.0 | length 1277.9
  Top Layer w50: J3.29 J3.30 2433.45,3380.34 TP12.0 2522.45,2923.34 ; R4.1 C2.2 R3.1@2572.45,2923.34
CT_VOUT-3.3V: C1.1 R7.2 R10.1 TP16.0 U3.33 | length 2308.6
  Top Layer w10: U3.33 1685.13,1086.13 ; 1685.13,1086.45 1685.45,1086.45 1708,1109 TP16.0
  Top Layer w50: R10.1 1922.77,2923.34 v1(1982.45,2923.34) C1.1
  Bottom Layer w20: TP16.0 1708,1249 1982.45,1523.45 v1(1982.45,2923.34)
DGND: C3.2 C4.2 C5.2 C8.2 C9.2 C10.2 C11.2 C12.2 C15.2 C16.2 C17.2 C18.2 C19.2 C20.1 C21.1 C22.1 C23.2 D7.2 J1.4 J3.3 J3.4 J3.7 J3.8 J3.17 J3.18 J4.5 J5.2 J7.4 Q1.2 R10.2 R18.2 R22.1 R23.1 R25.2 R37.1 R42.2 R43.2 R45.2 S1.1 TP6.0 U3.10 U3.19 U3.20 U3.27 U3.49 U3.75 U3.94 U3.99 U7.2 U8.15 U8.19 U8.35 U8.36 U8.47 U8.49 U9.15 U11.1 U12.2 U13.2 | length 22470.2
  Top Layer w10: C18.2 719.18,1040.18 745.45,1066.45 U3.94 v1(1076.45,1066.45) v1@1078.34,1068.34 ; U3.99 1018.34,968.02 1078.34,1028.02 v1@1078.34,1068.34 ; U3.75 1038.97,1367.71 v1(1078.34,1328.34) v1@1078.34,1068.34 ; U8.19 1148.6,2218.18 U8.49 ; v3(1197.45,968.02) 1197.45,952.02 1216.13,933.34 U3.10 ; U8.15 1227.34,2277.24 U8.49 ; U8.47 1247.03,2119.76 1162.45,2204.34 1162.45,2173.34 1089.18,2100.07 U8.36 923.71,2100.07 v3(917.45,2106.34) 930.86,2119.76 U8.35 1069.86,2119.76 U8.49 ; v1(1272.45,1328.34) 1462.45,1328.34 1535.2,1401.09 U3.49 2019.25,1401.09 2037.01,1383.34 R18.2 ; U3.19 v3@1393.3,957.49 ; v3(1393.3,968.02) 1397.76,968.02 1412.98,952.8 U3.20 ; v3(1487.45,968.02) U3.27
  Top Layer w15: v2@2228.45,293.84 v2(2229.45,292.84)
  Top Layer w20: U12.2 v4(502.45,-79.66) ; U9.15 590.45,1385.3 620.45,1415.3 v4(620.45,1504.34) ; C16.2@853.89,1788.34 887.45,1788.34 917.45,1818.34 v3(917.45,2106.34) ; J3.18 J3.17 1374.45,3074.55 v2(1399,3050) 1399.4,3050.4 U13.2 1831.05,3050.4 1869.45,3012 1869.45,2849.34 1885.12,2833.66 R10.2 ; v2@2228.45,293.84 U7.2
  Top Layer w30: J1.4 4.45,2085.34 ; v2(4.45,2147.34) 4.45,2085.34 ; D7.2 330.12,573.34 347.45,556.02 U11.1 ; Q1.2 192.45,2033.34 140.45,2085.34 4.45,2085.34 ; C22.1 v2(621.45,2147.34) 621.45,1822.34 655.45,1788.34 C15.2
  Top Layer w40: v2(-24.55,1513.34) -40.55,1497.34 -40.55,1307.34 ; C11.2 -38.18,1304.96 -40.55,1307.34 ; D7.2 R43.2 167.45,850.55 v2(56,962) C12.2 -2.62,1050.4 -40.55,1088.34 -40.55,1307.34 ; U11.1 v7(464.45,496.34) 464.45,693.61 C18.2 ; v2(502.45,95.34) 697.45,95.34 ; R45.2 697.45,95.34 ; C15.2 780.45,1788.34 ; R37.1 C19.2@864.59,2832.34 ; v2(780.45,1686.34) 780.45,1788.34 ; C10.2 832.45,90.34 837.45,95.34 ; C16.2 780.45,1788.34 ; C19.2 v2(864.59,2949.48) ; C4.2 1052.45,157.34 990.45,95.34 837.45,95.34 ; v6(1232,117) C3.2 1232.45,408.34 ; C21.1 v7(2229.45,29.34) ; v2(2483.45,650.34) 3010.34,650.34 3111,751 3111,1394.66 3224.68,1508.34 J5.2 ; 697.45,95.34 837.45,95.34
  Top Layer w50: v6(-77,326) -75,324 C17.2 ; v2(4.45,2147.34) 2.45,2149.34 C23.2 107.45,2557.34 162.45,2612.34 R42.2 v6(284.45,2767.34) ; C4.2 C5.2 1232.45,408.34 C9.2 1522.45,408.34 1557.45,443.34 C20.1 ; R25.2 v2(2413.45,243.34)
  Bottom Layer w10: TP6.0 -309,-55 -309,319.77 J7.4
  Bottom Layer w20: v1(1076.45,1066.45) 1076.45,989.02 1097.45,968.02 v3(1197.45,968.02) v3(1393.3,968.02) v3(1487.45,968.02) ; v1(1078.34,1328.34) v1(1272.45,1328.34) ; 2229.45,238.34 2234.45,243.34
  Bottom Layer w30: -76.55,399.34 -72.55,403.34 ; v2(4.45,2147.34) v2(621.45,2147.34) ; 461.45,403.34 464.45,406.34 ; v4(502.45,-79.66) v2(502.45,95.34) ; 2234.45,243.34 v2(2413.45,243.34)
  Bottom Layer w40: J4.5 -125.55,1001.34 -86.21,962 v2(56,962) ; v2(-24.55,1513.34) 611.45,1513.34 v4(620.45,1504.34) 701.45,1504.34 780.45,1583.34 v2(780.45,1686.34) ; v2@56,976.34 v2@56.45,976.34 ; 674.45,3024.34 J3.3 J3.4 ; v2(864.59,2949.48) 864.59,3014.48 874.45,3024.34 J3.7 J3.8 ; v6(1232,117) 1232.45,-59.66 1285.45,-112.66 1522.82,-112.66 S1.1 2171.75,-213.35 2229.45,-155.66 v7(2229.45,29.34) 2229.45,238.34 v2(2229.45,292.84) ; v2(2413.45,243.34) 2483.45,313.34 v2(2483.45,650.34)
  Bottom Layer w50: J7.4 -72.55,403.34 461.45,403.34 ; v6@-76.55,309.34 -76.55,399.34 ; v6(284.45,2767.34) 284.45,2919.34 389.45,3024.34 674.45,3024.34 874.45,3024.34 1373.34,3024.34 v2(1399,3050) ; v7(464.45,496.34) 464.45,406.34 464.45,133.34 v2(502.45,95.34)
DP83_50MHZ: TP5.0 U8.25 | length 75.1
  Top Layer w10: U8.25 TP5.0
H-BRIDGE+: R20.1 R21.2 R23.2 | length 530.9
  Top Layer w40: R21.2@2373.45,612.34 2373.45,485.34 2427.79,431 R20.1 2623.89,432.11 R23.2
H-BRIDGE-: J2.2 R24.2 | length 1131.3
  Top Layer w30: R24.2 R24.2@2418.45,33.34
  Top Layer w40: R24.2 2585.34,28.34 3020.34,463.34 J2.2
INT0: C3.1 R5.2 S1.3 U3.26 | length 1884.9
  Top Layer w10: U3.26 1674.45,948.34 1880.45,742.34 v4(1880.45,37.34)
  Top Layer w50: C3.1 R5.2 1557.45,49.56 S1.3
  Bottom Layer w30: S1.3 1826.6,-16.5 v4(1880.45,37.34)
LED: D6.2 U3.1 | length 424
  Top Layer w10: D6.2 942.45,704.45 1038.97,800.97 U3.1
LED_GREEN_-: J3.12 R33.1 U8.26 | length 1709.3
  Top Layer w10: U8.26 921.86,2296.92 897.45,2321.34 897.45,2541.34 v1(882.45,2556.34) 780.45,2658.34 705.45,2658.34 698.45,2665.34 698.45,2910.34 994.45,3206.34 1093.45,3206.34 1124.45,3237.34 1124.45,3330.34 J3.12
  Top Layer w40: R33.1 v1(764.45,2557.34)
  Bottom Layer w20: v1(764.45,2557.34) 881.45,2557.34 v1(882.45,2556.34)
LED_YELLOW_-: J3.11 R31.1 U8.28 | length 1602.1
  Top Layer w10: R31.1 818.01,2452.9 818.45,2453.34 ; U8.28 850.23,2257.55 818.45,2289.34 818.45,2453.34 ; J3.11 1074.45,3266.34 1036.45,3228.34 966.45,3228.34 666.45,2928.34 666.45,2648.34 684.45,2630.34 761.45,2630.34 772.45,2630.34 818.45,2584.34 818.45,2453.34
MII_MDC: U3.16 U8.31 | length 2209.4
  Top Layer w10: v5(827.45,2185.34) 840.6,2198.5 U8.31 ; U3.16 1334.24,816.54 v1(1334.45,816.34)
  Bottom Layer w20: v5(827.45,2185.34) 827.45,1986.34 1632.45,1181.34 1632.45,850.34 1598.45,816.34 v1(1334.45,816.34)
MII_MDIO: R35.1 U3.25 U8.30 | length 2217.3
  Top Layer w10: v5(787.45,2211.34) 794.29,2218.18 U8.30 ; U3.25 1628.39,882.39 1662.45,848.34 R35.1
  Bottom Layer w20: v5(787.45,2211.34) 787.45,1968.34 1579.45,1176.34 v1(1579.45,882.34)
MII_RX_DV/RMII_CRSDV: R34.2 U3.55 U8.40 | length 917.6
  Top Layer w10: U8.40 1109.23,1878.13 R34.2 1280.45,1877.34 1299.45,1858.34 v1(1299.45,1784.34) ; U3.55 1432.67,1548.65 1454.89,1570.87 v1(1454.89,1784.34) ; 1454.45,1759.43 v1@1454.45,1784.34
  Bottom Layer w20: v1(1299.45,1784.34) v1(1454.89,1784.34)
MII_RXD0: U3.56 U8.43 | length 764.6
  Top Layer w10: U8.43 1168.29,1951.5 1191.45,1928.34 1388.45,1928.34 1412.98,1903.8 U3.56
MII_RXD1: U3.57 U8.44 | length 885
  Top Layer w10: U8.44 1187.97,1972.81 1206.45,1954.34 1430.45,1954.34 1452.89,1931.9 v1(1452.89,1856.34) ; v1(1367.45,1856.34) 1367.45,1811.34 1393.3,1785.49 U3.57
  Bottom Layer w20: v1(1367.45,1856.34) v1(1452.89,1856.34)
MII_TX_EN: U3.48 U8.2 | length 1239.4
  Top Layer w10: U8.2 1383.03,2119.76 1402.45,2100.34 v1(1402.45,2039.34) ; U3.48 1645.38,1381.41 v1(1667.45,1359.34) ; v1(1579.45,2039.34) 1579.45,1526.72 1617.83,1488.34 v1(1667.45,1488.34)
  Bottom Layer w20: v1(1402.45,2039.34) v1(1579.45,2039.34)
  Bottom Layer w30: v1(1667.45,1359.34) 1692.45,1359.34 1722.45,1389.34 1722.45,1464.34 1698.45,1488.34 v1(1667.45,1488.34)
MII_TXD0: U3.51 U8.3 | length 854.8
  Top Layer w10: U8.3 1425.34,2139.44 1444.45,2120.34 v1(1444.45,2100.34) ; U3.51 1511.41,1574.34 1535.45,1598.38 v1(1535.45,2100.34)
  Bottom Layer w20: v1(1444.45,2100.34) v1(1535.45,2100.34)
MII_TXD1: U3.52 U8.4 | length 819.5
  Top Layer w10: U8.4 1470.45,2159.13 1491.72,2137.85 U3.52
NetC1_2: C1.2 C24.1 R1.2 U1.6 | length 556.1
  Top Layer w20: R1.2 2006.71,2665.61 2020.45,2679.34 2020.45,2736.34 2042.45,2758.34 2162.45,2758.34 ; U1.6 2162.45,2758.34 ; C1.2 2162.45,2832.9 2162.45,2758.34
  Top Layer w50: C24.1 1837.71,2665.61 R1.2
NetC7_2: C7.2 C25.1 R12.2 U5.6 | length 600.3
  Top Layer w20: R12.2 2037.45,1153.34 2072.45,1188.34 2307.45,1188.34 ; U5.6 2307.45,1188.34 ; C7.2 2307.45,1248.34 2307.45,1188.34
  Top Layer w50: C25.1 R12.2
NetC11_1: C11.1 U9.2 | length 219.5
  Top Layer w20: C11.1 192.01,1304.96 217.45,1330.4 217.45,1365.4 237.34,1385.3 U9.2
NetC12_1: C12.1 U9.6 | length 259.7
  Top Layer w20: C12.1 187.55,1050.4 222.45,1085.3 222.45,1150.4 257.34,1185.3 U9.6
NetC13_1: C13.1 U9.1 | length 169.3
  Top Layer w20: C13.1 154.7,1435.3 U9.1
NetC13_2: C13.2 U9.3 | length 623.9
  Top Layer w20: C13.2 56.08,1494.04 72.45,1510.4 357.45,1510.4 384.45,1483.4 384.45,1353.34 366.4,1335.3 U9.3
NetC14_1: C14.1 U9.4 | length 326.8
  Top Layer w20: C14.1 56.08,1219.04 77.45,1240.4 192.01,1240.4 236.9,1285.3 U9.4
NetC14_2: C14.2 U9.5 | length 190.5
  Top Layer w20: C14.2 192.45,1175.4 252.34,1235.3 U9.5
NetC15_1: C15.1 U8.33 Y3.2 | length 515.4
  Top Layer w10: Y3.2 710.05,2090.34 726.05,2106.34 835.45,2106.34 888.23,2159.13 U8.33
  Top Layer w40: C15.1 710.05,1878.94 Y3.2
NetC16_1: C16.1 U8.34 Y3.1 | length 354.5
  Top Layer w10: Y3.1@881.45,2017.94 881.45,2122.44 898.45,2139.44 U8.34
  Top Layer w40: Y3.1@847.34,2017.84 847.89,2017.3 C16.1
NetC19_1: C19.1 U8.18 U8.23 U8.37 | length 1429.2
  Top Layer w10: C19.1 864.59,2651.2 874.45,2641.34 1008.45,2641.34 1069.86,2579.92 v4(1069.86,2529.34) ; v1(959.17,2034.62) U8.37@1049.86,2034.62 ; U8.23 v4(1069.86,2529.34) ; U8.18 1168.29,2496.5 1135.45,2529.34 v4(1069.86,2529.34)
  Bottom Layer w30: v1(959.17,2034.62) 959.17,2296.83 908,2348 908,2432.89 1004.45,2529.34 v4(1069.86,2529.34)
NetC20_2: C20.2 U3.14 | length 466.7
  Top Layer w10: U3.14 1294.87,782.91 1311.45,766.34 1531.45,766.34 1557.45,740.34 C20.2
NetC22_2: C22.2 U8.29 | length 276.2
  Top Layer w10: C22.2 718.51,2237.87 U8.29
NetC24_2: C24.2 R1.1 R4.2 U1.2 | length 1123.5
  Top Layer w20: R1.1 1947.01,2408.78 1982.45,2373.34 2082.45,2373.34 2112.45,2403.34 U1.2 v1(2112.45,2548.34) ; R4.2 R4.2@2357.45,2833.34
  Top Layer w30: v1(2267.45,2833.34) R4.2
  Top Layer w50: C24.2 1837.71,2575.61 R1.1
  Bottom Layer w20: v1(2112.45,2548.34) 2112.45,2798.34 2147.45,2833.34 v1(2267.45,2833.34)
NetC25_2: C25.2 R12.1 R15.2 U5.2 | length 1053.1
  Top Layer w20: R12.1 2037.45,858.34 2092.45,803.34 2227.45,803.34 2257.45,833.34 U5.2 v1(2257.45,983.34) ; R15.2@2446.52,1252.42 R15.2
  Top Layer w40: v1(2390.45,1252.42) R15.2@2446.52,1252.42
  Top Layer w50: C25.2 R12.1
  Bottom Layer w20: v1(2257.45,983.34) 2257.45,1023.34 2390.45,1156.34 v1(2390.45,1252.42)
NetD3_1: D3.1 D4.2 R11.1 T1.1 U4.2 | length 2753.5
  Top Layer w20: v1(2656.08,814.98) U4.2 ; v2@2955.45,1343.34 v2(2957.45,1341.34)
  Top Layer w30: D3.1 1678.84,1926.73 1653.45,1901.34 1653.45,1591.34 1671.05,1573.73 D4.2 1748.84,1573.34 T1.1 2257.45,1448.34 2833.45,1448.34 2861.45,1420.34 R11.1
  Top Layer w50: R11.1 v2@2955.45,1343.34
  Bottom Layer w20: v1(2656.08,814.98) 2906.08,814.98 2957.45,866.34 v2(2957.45,1341.34)
NetD5_1: D5.1 Q1.3 U6.2 | length 514.1
  Top Layer w30: U6.2 -135.94,1932.34 42.45,1932.34 ; Q1.3 42.45,1932.34 ; D5.1 77.45,1772.34 42.45,1807.34 42.45,1932.34
NetD6_1: D6.1 R38.1 | length 106.4
  Top Layer w50: R38.1 837.45,408.34 D6.1
NetD7_1: D7.1 R39.1 | length 105
  Top Layer w40: R39.1 D7.1
NetD8_1: D8.1 L1.2 U12.1 | length 273.6
  Top Layer w20: L1.2 414.77,-257.34 U12.1@414.77,-117.06
  Top Layer w50: L1.2 D8.1@542.45,-259.66
NetJ2_3: J2.3 R22.2 | length 645.1
  Top Layer w40: R22.2 3161,561 3213.34,613.34 J2.3
NetJ5_1: J5.1 J9.2 | length 320
  Top Layer w80: J9.2 J5.1
NetQ1_1: Q1.1 R41.1 | length 102.7
  Top Layer w30: Q1.1 294.57,1894.34 R41.1@295.01,1893.9
NetR3_2: R3.2 U2.6 | length 139
  Top Layer w20: U2.6 R3.2@2592.45,2813.34
NetR6_1: R6.1 U2.8 | length 113.6
  Top Layer w20: R6.1 2391.14,2674.3 U2.8
NetR6_2: R6.2 U2.1 | length 202.1
  Top Layer w20: R6.2 2382.45,2493.34 2406.21,2469.58 U2.1
NetR9_2: R9.2 U1.3 | length 126.2
  Top Layer w20: R9.2 U1.3
NetR11_2: R11.2 R14.1 U4.6 | length 266.3
  Top Layer w20: U4.6 2706.08,1252.42 R14.1
  Top Layer w50: R14.1 2827.89,1253.34
NetR13_2: R13.2 T1.4 | length 555.1
  Top Layer w50: T1.4 2526.15,1639.72 2604.45,1718.02 R13.2
NetR17_2: R17.2 U5.3 | length 145.7
  Top Layer w20: R17.2 U5.3
NetR19_1: R19.1 R21.1 U7.4 | length 264.4
  Top Layer w20: U7.4 2265.85,594.74 R21.1@2283.45,612.34
  Top Layer w50: R19.1 2149.45,612.34 R21.1@2283.45,612.34
NetR19_2: R19.2 R40.2 U7.1 | length 568.5
  Top Layer w20: R19.2 2058.45,428.34 2080.77,406.02 2148.45,406.02 ; R40.2 2148.45,406.02 ; U7.1 2148.45,406.02
NetR24_1: R24.1 R25.1 U7.3 | length 424.9
  Top Layer w20: U7.3 2305.77,406.02 2323.45,388.34 R25.1
  Top Layer w40: R24.1 R25.1
NetR30_2: R30.2 U8.39 | length 219.3
  Top Layer w10: R30.2 1003.45,1934.34 1031.45,1962.34 1076.45,1962.34 1089.55,1975.44 U8.39
NetR32_1: R32.1 U8.27 | length 323.2
  Top Layer w10: v3@760.89,2348.9 v3(761.45,2348.34) ; v3(856.45,2347.34) 856.45,2312.78 891.99,2277.24 U8.27
  Top Layer w30: R32.1 v3@760.89,2348.9
  Bottom Layer w10: v3@855.45,2348.34 v3(856.45,2347.34)
  Bottom Layer w20: v3(761.45,2348.34) v3@855.45,2348.34
NetR36_2: R36.2 U8.7 | length 141.3
  Top Layer w10: U8.7 1473.29,2218.18 R36.2
NetR37_2: R37.2 U8.24 | length 582.2
  Top Layer w10: R37.2@750.34,2754.34 R37.2 793.45,2742.34 815.45,2720.34 815.45,2658.34 855.45,2618.34 958.66,2618.34 1011,2566 1011,2462 1050.18,2422.82 U8.24
NetR44_2: R44.2 R45.1 U12.3 | length 331.5
  Top Layer w20: U12.3 429.77,-12.34 442.45,0.34 R45.1 ; 604.85,-42.26 607.45,-39.66
  Top Layer w50: R44.2 607.45,-39.66 R45.1
NetR47_2: R47.2 R48.2 U13.4 | length 235.3
  Top Layer w20: U13.4 1704,3013 1714.45,3002.55 R47.2
  Top Layer w40: R47.2 R48.2
PE: C23.1 R42.1 TP1.0 | length 504.6
  Top Layer w50: TP1.0 TP1.0@0,3200.89 ; C23.1 R42.1
  Top Layer w120: TP1.0 2.45,3147.16 C23.1
PT_VOUT: C6.2 J3.25 J3.26 R14.2 R15.1 TP13.0 | length 3568.4
  Top Layer w30: R15.1 R14.2
  Top Layer w50: R14.2 v4(2775.45,1343.34)
  Bottom Layer w30: J3.26 J3.25 1889.45,3165.34 2708,3165.34 ; TP13.0 2709,3166.34 2708,3165.34 ; v4(2775.45,1343.34) 2896,1463.89 2896,3111 2841.66,3165.34 2708,3165.34
PT_VOUT-3.3V: C7.1 R16.2 R18.1 TP15.0 U3.32 | length 953.4
  Top Layer w10: U3.32 1765.56,1066.45 1789.45,1090.34 1789.45,1221.34 1821.45,1253.34 TP15.0
  Top Layer w20: R18.1 R16.2 2218.37,1253.34 2237.45,1272.42 2237.45,1318.34 2262.45,1343.34 C7.1
  Top Layer w30: TP15.0 R18.1
RD+: J3.15 R28.1 U8.14 | length 994.9
  Top Layer w10: R28.1 1295.45,2742.34 1298.45,2745.34 ; U8.14 1247.03,2626.82 1298.45,2678.24 1298.45,2745.34 ; J3.15 1298.45,3256.34 1298.45,2745.34
RD-: J3.16 R29.1 U8.13 | length 1125.4
  Top Layer w10: U8.13 1299.45,2382.06 1325.45,2408.06 1325.45,2742.34 ; J3.16 1325.45,3329.34 1325.45,2742.34 ; R29.1 1325.45,2742.34
RX1-PC: J3.1 U9.7 | length 2350.8
  Top Layer w20: U9.7 381.4,1135.3 425.45,1179.34 425.45,3227.34 478.45,3280.34 J3.1
RX2-PC: J3.5 U9.14 | length 2245.6
  Top Layer w20: U9.14 622.4,1335.3 682.45,1395.34 682.45,1592.34 504.45,1770.34 504.45,2954.34 774.45,3224.34 J3.5
SPI3_MISO: J4.3 U3.79 | length 1261
  Top Layer w10: v3(795.45,1320.34) 873.08,1320.34 914.46,1361.72 U3.79
  Bottom Layer w20: J4.3 -153.55,1201.34 -34.55,1320.34 v3(795.45,1320.34)
SPI3_MOSI: J4.4 U3.80 | length 1294.3
  Top Layer w10: v3(751.45,1283.34) 873.45,1283.34 932.15,1342.04 U3.80
  Bottom Layer w20: J4.4 -166.55,1101.34 15.45,1283.34 v3(751.45,1283.34)
SPI3_NSS: J4.1 U3.77 | length 1200.3
  Top Layer w10: v3(873.45,1401.34) 873.69,1401.09 U3.77
  Bottom Layer w10: J4.1@-221.55,1387.71 J4.1@-207.92,1401.34
  Bottom Layer w20: J4.1@-207.92,1401.34 v3(873.45,1401.34)
SPI3_SCK: J4.2 U3.78 | length 1227.7
  Top Layer w10: v3(835.83,1361.72) 882.46,1361.72 902.15,1381.41 U3.78
  Bottom Layer w20: J4.2 -144.55,1301.34 -84.17,1361.72 v3(835.83,1361.72)
SWCLK: J1.3 U3.76 | length 1836.7
  Top Layer w10: U3.76 973.45,1421.21 v1(973.45,1551.34)
  Bottom Layer w20: J1.3 -160.68,2233.34 669.45,2233.34 696.45,2206.34 696.45,1951.34 973.45,1674.34 v1(973.45,1551.34)
SWDIO: J1.2 U3.72 | length 1869.5
  Top Layer w10: v1(1072.45,1606.34) 1098.02,1580.76 U3.72
  Bottom Layer w20: J1.2 695.45,2285.34 748.45,2232.34 748.45,1956.34 1072.45,1632.34 v1(1072.45,1606.34)
TD+: J3.13 R26.1 U8.17 | length 1081
  Top Layer w10: R26.1 1037.45,2742.34 1039.45,2740.34 ; J3.13 1174.45,3222.34 1039.45,3087.34 1039.45,2740.34 ; U8.17 1187.97,2529.34 1039.45,2677.87 1039.45,2740.34
TD-: J3.14 R27.1 U8.16 | length 1126.5
  Top Layer w10: R27.1 1167.45,2742.34 1169.45,2740.34 ; J3.14 1224.45,3330.34 1224.45,3157.34 1169.45,3102.34 1169.45,2740.34 ; U8.16 1207.66,2638.13 1169.45,2676.34 1169.45,2740.34
TEMP_VOUT: C21.2 J3.23 J3.24 R40.1 TP11.0 U3.31 | length 5765.9
  Top Layer w10: U3.31 1671.45,1046.76 1956.45,761.76 1956.45,285.55 1973.66,268.34 TP11.0
  Top Layer w40: C21.2 R40.1 TP11.0
  Bottom Layer w30: J3.24 J3.23 1855.45,3099.34 2771.66,3099.34 2827,3044 2827,1547.89 2610.45,1331.34 2610.45,907 2299,595.55 2299,508.89 TP11.0
TX1-PC: J3.2 U9.8 | length 2519.6
  Top Layer w20: U9.8 437.4,1085.3 462.45,1110.34 462.45,2992.34 625.45,3155.34 625.45,3329.34 J3.2
TX2-PC: J3.6 U9.13 | length 2444.8
  Top Layer w20: U9.13 638.45,1285.3 722.45,1369.3 722.45,1611.34 545.45,1788.34 545.45,2935.34 823.45,3213.34 823.45,3331.34 J3.6
USART1_RX: U3.93 U9.9 | length 441.1
  Top Layer w10: U9.9 533.12,1086.13 U3.93
USART1_TX: U3.92 U9.10 | length 452.9
  Top Layer w10: U9.10 684.97,1135.3 714.45,1105.82 U3.92
USART2_RX: U3.87 U9.12 | length 453.6
  Top Layer w10: U9.12 630.49,1235.3 661.54,1204.24 U3.87
USART2_TX: U3.86 U9.11 | length 471.6
  Top Layer w10: U9.11@533.18,1184.4 U9.11 533.33,1186.34 v1(614.45,1186.34) ; v1(684.38,1240.4) 889.38,1240.4 905.86,1223.93 U3.86
  Bottom Layer w20: v1(614.45,1186.34) 668.51,1240.4 v1(684.38,1240.4)
USB_DM: J3.19 U3.70 | length 2284.6
  Top Layer w10: U3.70 1137.39,1646.28 1197.45,1706.34 v5(1211.45,1706.34)
  Bottom Layer w20: v5(1211.45,1706.34) 1538.45,1706.34 1657.45,1825.34 1657.45,2207.34 1512.45,2352.34 1512.45,3158 1474.45,3196 J3.19
USB_DP: J3.20 U3.71 | length 2400.8
  Top Layer w10: U3.71 1117.71,1679.6 v5(1181.45,1743.34)
  Bottom Layer w20: v5(1181.45,1743.34) 1516.45,1743.34 1621.45,1848.34 1621.45,2184.34 1469.45,2336.34 1469.45,3131 1424.45,3176 1424.45,3330.34 J3.20
USB_ID: J3.22 U3.69 | length 2416.3
  Top Layer w10: U3.69 1157.08,1608.28 1217.13,1668.34 v5(1239.45,1668.34)
  Bottom Layer w20: v5(1239.45,1668.34) 1572.45,1668.34 1693.45,1789.34 1693.45,2229.34 1549.45,2373.34 1549.45,3204 1522.45,3231 1522.45,3328.34 J3.22
USB_PSOn: R48.1 U3.65 | length 1824.8
  Top Layer w10: U3.65@1235.45,1496.04 1235.45,1532.34 1257.45,1554.34 v5(1324.45,1554.34) ; U3.65 U3.65@1235.82,1496.04 ; v1(1817.45,2775.34) R48.1 R48.1@1818.45,2831.34
  Bottom Layer w20: v5(1324.45,1554.34) 1661.45,1554.34 1817.45,1710.34 v1(1817.45,2775.34)
USB_VBUS: J3.21 U3.68 U13.1 | length 2495.5
  Top Layer w10: U3.68 1176.76,1572.65 1234.45,1630.34 v5(1268.45,1630.34)
  Top Layer w20: J3.21 1582,3272.79 U13.1
  Bottom Layer w20: v5(1268.45,1630.34) 1595.45,1630.34 1731.45,1766.34 1731.45,2267.34 1590.45,2408.34 1590.45,3264.34 J3.21
USBFAULT: R46.1 U3.66 U13.3 | length 2097.7
  Top Layer w10: U3.66 1216.13,1556.34 1252.13,1592.34 v5(1294.45,1592.34)
  Top Layer w20: U13.3 1582.45,3012.55 R46.1
  Top Layer w30: R46.1 v1(1650.45,2921.34)
  Bottom Layer w10: v1@1651.45,2925.34 1651.45,2923.34 v1@1653.45,2925.34
  Bottom Layer w20: v5(1294.45,1592.34) 1620.45,1592.34 1774.45,1746.34 1774.45,2300.34 1650.45,2424.34 v1(1650.45,2921.34)
XTAL-25M-1: C8.1 U3.12 Y2.2 | length 433.2
  Top Layer w10: U3.12 1255.5,724.28 1266.45,713.34 1297.05,713.34 1308.05,702.34 Y2.2
  Top Layer w40: C8.1@1308.05,503.5 C8.1 1302.89,628.18 Y2.2
XTAL-25M-2: C9.1 U3.13 Y2.1 | length 538.1
  Top Layer w10: U3.13 1275.19,755.6 1290.45,740.34 1427.84,740.34 1444.84,723.34 Y2.1
  Top Layer w40: Y2.1 1452.89,625.3 C9.1
XTAL-32.768K-1: C4.1 U3.8 Y1.2 | length 488.7
  Top Layer w10: Y1.2 1054.05,724.94 1072.45,743.34 1162.45,743.34 1176.76,757.65 U3.8
  Top Layer w40: C4.1@1051.45,498.34 1054.05,500.94 Y1.2
XTAL-32.768K-2: C5.1 U3.9 Y1.1 | length 386.6
  Top Layer w10: Y1.1 1196.45,638.94 U3.9
  Top Layer w40: Y1.1 1190.84,498.94 C5.1
pads on no net: S1.0 S1.2 S1.4 TP2.0 TP3.0 TP4.0 U1.1 U1.5 U1.8 U3.2 U3.3 U3.4 U3.5 U3.7 U3.15 U3.17 U3.18 U3.23 U3.24 U3.29 U3.30 U3.34 U3.35 U3.36 U3.37 U3.38 U3.39 U3.40 U3.41 U3.42 U3.43 U3.44 U3.45 U3.46 U3.47 U3.53 U3.54 U3.58 U3.59 U3.60 U3.61 U3.62 U3.63 U3.64 U3.67 U3.73 U3.81 U3.82 U3.83 U3.84 U3.85 U3.88 U3.90 U3.91 U3.95 U3.96 U3.97 U3.98 U4.1 U4.5 U4.8 U5.1 U5.5 U5.8 U8.1 U8.5 U8.6 U8.8 U8.9 U8.10 U8.11 U8.12 U8.20 U8.21 U8.38 U8.41 U8.42 U8.45 U8.46

## Polygon pours and split planes (outlines as drawn)
no net on Top Layer "Top Layer-No Net" (solid, pour order 0): 952,2414
DGND on Bottom Layer "Bottom Layer-DGND" (solid, pour order 9): 1033.82,2084.12 1283.82,2084.12 1283.82,2334.12 1033.82,2334.12

## Keep-outs
Keep-Out Layer:
  the board outline again, w20

## Silkscreen, mask and mechanical layers (free items; w line width, h text height)
Top Overlay:
  text "故指测试架主板" at 2306,-253 h100
  text "设计日期：20190718" at 2301,-361 h100
Mechanical 1:
  the board outline again, w20

## Text inside footprints (layer, text, board x,y; h text height)
D6: Top Overlay "+" at 961.45,319.34 h30 r90
D7: Top Overlay "+" at -11.55,554.34 h30
J7: Top Overlay "1" at -207.62,767.9 h30 r90